# Altium PCB PCB2.PcbDoc
Units mm, origin at the board's own origin, x right, y up, seen from the top; angles counter-clockwise.
Board outline 152.4 x 101.6 mm, 2 copper layers (Top Layer, Bottom Layer); 39 components, 32 nets, 125 pads, 0 vias.
Unrouted connection lines stored in the file: 9.
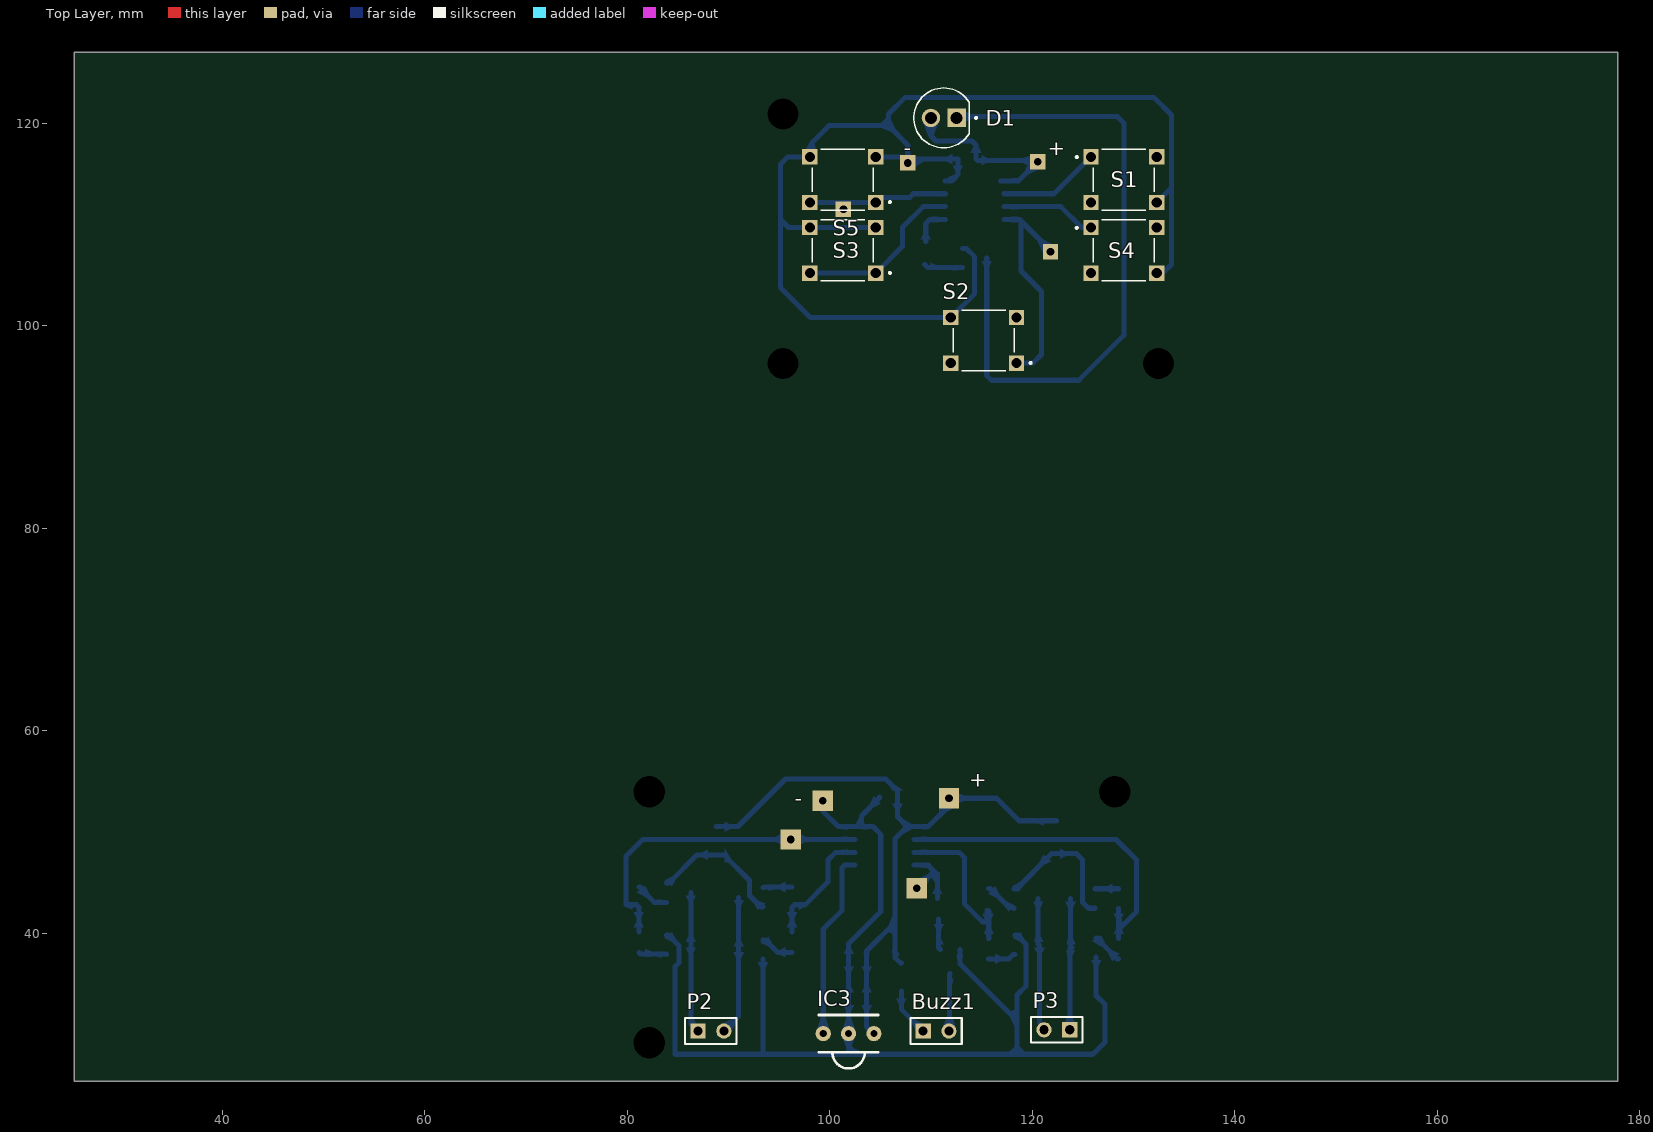
[diagram p0: Top Layer view]
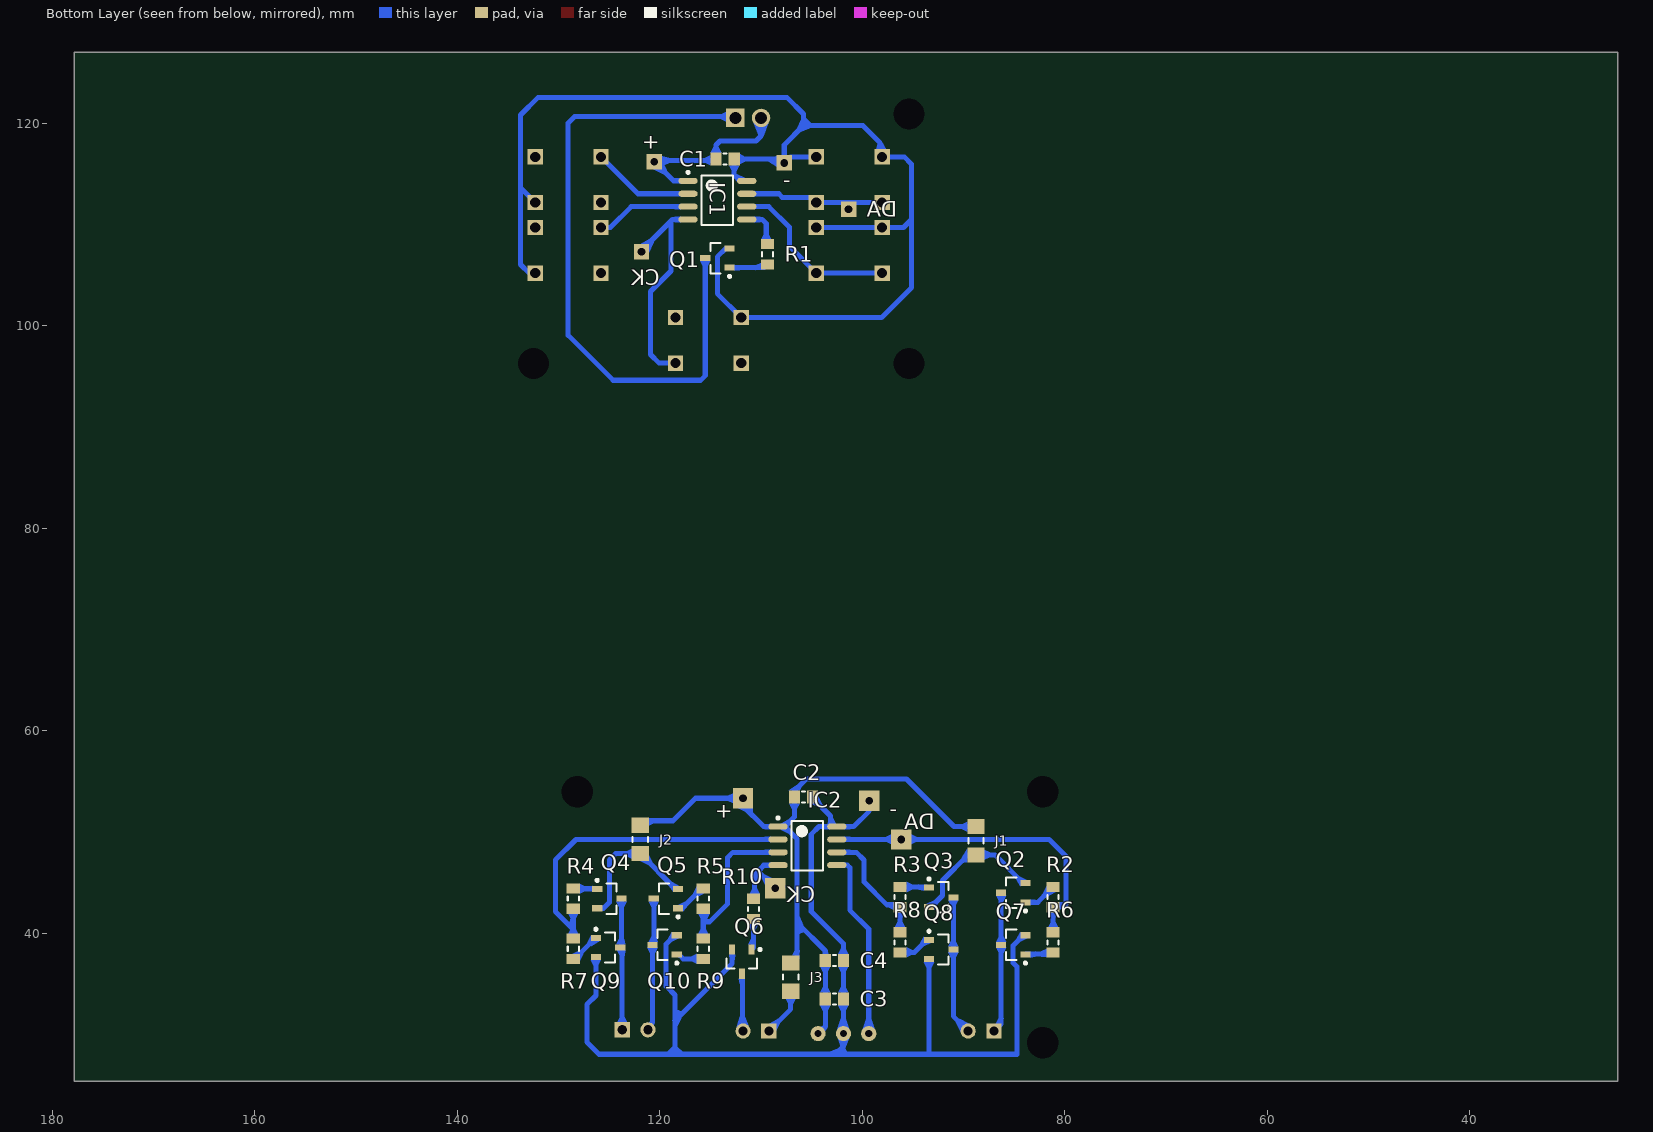
[diagram p1: Bottom Layer view, seen from below]
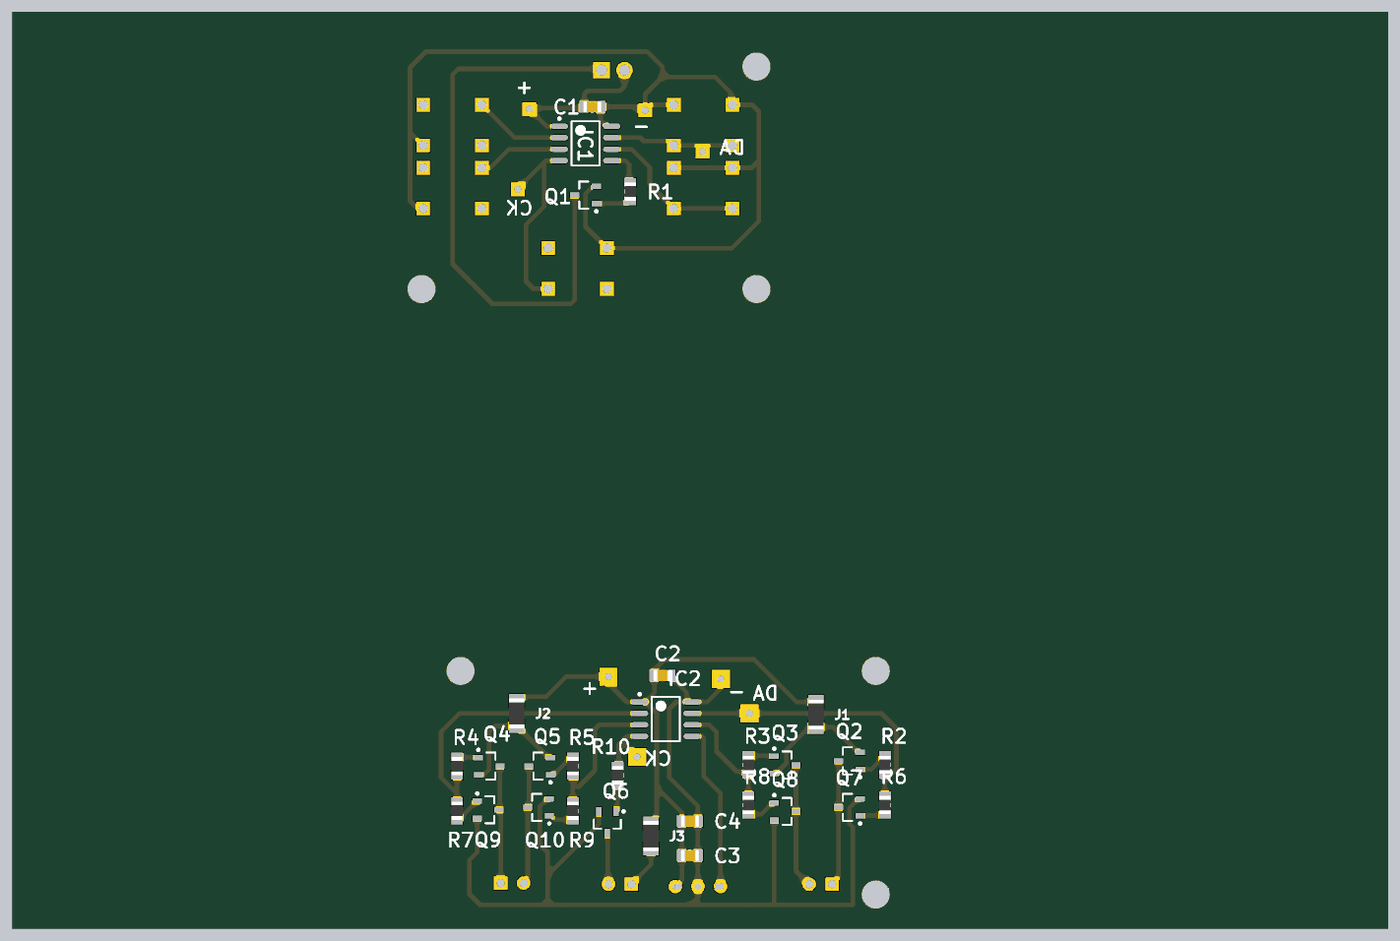
[diagram p2: 3D render of the assembled board from below, using the file's embedded part models]

## Layer stack, top to bottom
Top Solder: solder mask 0.0102, Solder Resist, Dk 3.5
Top Layer: signal copper 0.0356
Dielectric 1: dielectric 0.32, FR-4, Dk 4.8
Bottom Layer: signal copper 0.0356
Bottom Solder: solder mask 0.0102, Solder Resist, Dk 3.5

## Board outline
25.4,25.4 177.8,25.4 177.8,127 25.4,127

## Design rules (kind name [scope] priority, off if disabled: settings)
Clearance [All] p1: gap=0.3 ignorepadtopadclearanceinfootprint=FALSE
PolygonConnect [All] p1: connectstyle=Relief reliefconductorwidth=0.254 reliefentries=4 polygonreliefangle="90 Angle" airgapwidth=0.254
RoutingVias [All] p1: holewidth=0.711 width=1.27 viastyle="Through Hole" minholewidth=0.711 minwidth=1.27 maxholewidth=0.711 maxwidth=1.27
SolderMaskExpansion [All] p1: expansion=0.102
Width [All] p1: maxlimit=1 minlimit=0.254 preferedwidth=0.5
30 further rules are at their usual default settings.

## Classes and differential pairs
component class Sheet1: Buzz1 C1 C2 C3 C4 D1 IC1 IC2 IC3 P2 P3 Q1 Q2 Q3 Q4 Q5 Q6 Q7 Q8 Q9 Q10 R1 R2 R3 R4 R5 R6 R7 R8 R9 R10 S1 S2 S3 S4 S5

## Components (designator, comment, footprint, x,y, rotation, side; value= is the part's Value field where it differs from the comment)
Buzz1 "Header 2" HDR1X2 109.22,30.353 r0 top
C1 "Capacitor" CAPC2012X08N-805 113.538,116.459 r180 bottom value=100n
C2 "Capacitor" CAPC2012X08N-805 105.791,53.467 r180 bottom value=100n
C3 "Capacitor" CAPC2012X08N-805 102.743,33.528 r180 bottom value=100u
C4 "Capacitor" CAPC2012X08N-805 102.743,37.338 r180 bottom value=100n
D1 "L08R5000Q1" LEDRD254W57D500H1070 111.252,120.523 r180 top
IC1 "HT66f002" ht66f002 114.3,112.395 r180 bottom
IC2 "HT66f002" ht66f002 105.41,48.641 r180 bottom
IC3 "VS838" VS838 101.854,30.099 r90 top
J1 "Resistor" RESC3216X08N-1206 88.773,49.149 r90 bottom value=1k (schematic designator R111)
J2 "Resistor" RESC3216X08N-1206 121.92,49.276 r90 bottom value=1k (schematic designator R111)
J3 "Resistor" RESC3216X08N-1206 107.061,35.687 r90 bottom value=1k (schematic designator R111)
P2 "Header 2" HDR1X2 86.995,30.353 r0 top
P3 "Header 2" HDR1X2 123.698,30.48 r180 top
Q1 "c945" c945 114.3,106.68 r0 bottom
Q2 "PNP" pmbt8550 85.09,44.011 r0 bottom
Q3 "PNP" pmbt8550 92.202,43.561 r180 bottom
Q4 "PNP" pmbt8550 124.968,43.434 r180 bottom
Q5 "PNP" pmbt8550 119.38,43.434 r0 bottom
Q6 "NPN" MMBT8050 111.887,37.211 r270 bottom
Q7 "NPN" MMBT8050 85.09,38.862 r0 bottom
Q8 "NPN" MMBT8050 92.202,38.412 r180 bottom
Q9 "NPN" MMBT8050 125.095,38.608 r180 bottom
Q10 "NPN" MMBT8050 119.507,38.862 r0 bottom
R1 "Resistor" RESC2012X06N-805 109.347,107.061 r270 bottom value=1K
R2 "Resistor" RESC2012X06N-805 81.153,43.577 r90 bottom value=1k
R3 "Resistor" RESC2012X06N-805 96.266,43.577 r90 bottom value=1k
R4 "Resistor" RESC2012X06N-805 128.524,43.434 r90 bottom value=1k
R5 "Resistor" RESC2012X06N-805 115.697,43.434 r90 bottom value=1k
R6 "Resistor" RESC2012X06N-805 81.153,39.116 r90 bottom value=1k
R7 "Resistor" RESC2012X06N-805 128.524,38.481 r90 bottom value=1k
R8 "Resistor" RESC2012X06N-805 96.266,39.116 r90 bottom value=1k
R9 "Resistor" RESC2012X06N-805 115.697,38.481 r90 bottom value=1k
R10 "Resistor" RESC2012X06N-805 110.744,42.418 r270 bottom value=1k
S1 "TS04-66-95-BK-100-SMT" SW_TS02-66-43-BK-160-SCR-D 129.032,114.427 r0 top
S2 "TS04-66-95-BK-100-SMT" SW_TS02-66-43-BK-160-SCR-D 115.189,98.552 r180 top
S3 "TS04-66-95-BK-100-SMT" SW_TS02-66-43-BK-160-SCR-D 101.284,107.442 r180 top
S4 "TS04-66-95-BK-100-SMT" SW_TS02-66-43-BK-160-SCR-D 129.032,107.442 r0 top
S5 "TS04-66-95-BK-100-SMT" SW_TS02-66-43-BK-160-SCR-D 101.284,114.427 r180 top

## Footprints (in the part's own frame and the unit in brackets; to place one, negate y for a bottom-side part, rotate by r counter-clockwise, add the part's x,y. Pads: shape width x height; smd on the part's side, far side on the other; paste and mask are expansions set on the pad)
c945 [mm] "SOT23, 3-Leads, Body 2.90x2.45mm, Pitch 0.95mm, IPC Medium Density"
  rect 1x0.6 smd: B(-1.2,0.95) C(1.2,0) E(-1.2,-0.95)
  silkscreen extent -1.32,-1.5 0.7,1.92, body extent -0.7,-1.5 0.7,1.5, height 1.1
CAPC2012X08N-805 [mm] "Chip Capacitor, 2-Leads, Body 2.00x1.25mm, IPC Medium Density"
  rect 1.1x1.3 smd: 1(-0.9,0) 2(0.9,0)
  silkscreen extent -0.15,-0.55 0.15,0.55, body extent -1,-0.63 1,0.63, height 0.8
HDR1X2 [mm] "Connector; Header; 2 Position"
  rect 1.5x1.5 hole 0.9: 1(0,0)
  round 1.5 hole 0.9: 2(2.54,0)
  silkscreen extent -1.27,-1.27 3.81,1.27
ht66f002 [mm] "SOIC, 8-Leads, Body 4.90x3.90mm, Pitch 1.27mm, IPC Medium Density"
  oval 1.9x0.6 smd: 1(-2.9,1.905) 2(-2.9,0.635) 3(-2.9,-0.635) 4(-2.9,-1.905) 5(2.9,-1.905) 6(2.9,-0.635) 7(2.9,0.635) 8(2.9,1.905)
  silkscreen extent -3.03,-2.45 1.55,2.88, body extent -1.95,-2.45 1.95,2.45, height 1.75
LEDRD254W57D500H1070 [mm]
  round 1.815 hole 1.21: A(1.27,0)
  rect 1.815x1.815 hole 1.21: C(-1.27,0)
  silkscreen extent -3.3,-2.96 2.96,2.96
MMBT8050 [mm] "SOT23, 3-Leads, Body 2.90x2.45mm, Pitch 0.95mm, IPC Medium Density"
  rect 1x0.6 smd: 1(-1.2,0.95) 2(-1.2,-0.95) 3(1.2,0)
  silkscreen extent -1.32,-1.5 0.7,1.92, body extent -0.7,-1.5 0.7,1.5, height 1.1
pmbt8550 [mm] "SOT23, 3-Leads, Body 2.90x2.45mm, Pitch 0.95mm, IPC Medium Density"
  rect 1x0.6 smd: 1(-1.2,0.95) 2(-1.2,-0.95) 3(1.2,0)
  silkscreen extent -1.32,-1.5 0.7,1.92, body extent -0.7,-1.5 0.7,1.5, height 1.1
RESC2012X06N-805 [mm] "Chip Resistor, 2-Leads, Body 2.00x1.25mm, IPC Medium Density"
  rect 1x1.3 smd: 1(-1,0) 2(1,0)
  silkscreen extent -0.2,-0.55 0.2,0.55, body extent -1,-0.63 1,0.63, height 0.6
RESC3216X08N-1206 [mm] "Chip Resistor, 2-Leads, Body 3.20x1.60mm, IPC Medium Density"
  rect 1.5x1.7 smd: 1(-1.4,0) 2(1.4,0)
  silkscreen extent -0.25,-0.75 0.25,0.75, body extent -1.65,-0.85 1.65,0.85, height 0.8
SW_TS02-66-43-BK-160-SCR-D [mm]
  rect 1.508x1.508 / inner round 1.508 / far side rect 1.508x1.508 hole 1: 1(-3.25,2.25)
  rect 1.508x1.508 hole 1: 2(-3.25,-2.25) 3(3.25,2.25) 4(3.25,-2.25)
  silkscreen extent -4.75,-3 3,3
VS838 [mm]
  round 1.5 hole 0.7: 1(0,2.5) 2(0,0) 3(0,-2.5)
  silkscreen extent -3.44,-2.95 1.84,2.95, body extent -3.42,-2.54 1.38,2.54, height 11

## Part data
Buzz1 P2 P3: "Header, 2-Pin", LatestRevisionDate=17-Jul-2002, LatestRevisionNote="Re-released for DXP Platform.", Publisher="Altium Limited"
C1 C2 C3 C4: "Standard Bipolar Capasitor"
D1: "LED, Orange, Through Hole, T-1 3/4 (5mm), 30 mA, 2.1 V, 635 nm", Package=None, Availability=Unavailable, MP=L08R5000Q1, Price=None
J1 J2 J3 R1 R2 R3 R4 R5 R6 R7 R8 R9 R10: "Standard Resistor"
Q2 Q3 Q4 Q5: library part pmbt8550
Q6 Q7 Q8 Q9 Q10: library part MMBT8050
S1 S2 S3 S4 S5: "6 x 6 mm, 4.3~9.5 mm Actuator Height, 100~260 gf, Surface Mount, SPST, Tactile Switch", Package=None, Availability="In Stock", Check_prices=https://www.snapeda.com/parts/TS04-66-95-BK-100-SMT/CUI+Devices/view-part/?ref=eda, CUI_purchase_URL=https://www.cuidevices.com/product/switches/tactile-switches/ts04-series?utm_source=snapeda.com&utm_medium=referral&utm_campaign=snapedaBOM, MF="CUI Devices", MP=TS04-66-95-BK-100-SMT, Price=None, Purchase-URL=https://pricing.snapeda.com/search/part/TS04-66-95-BK-100-SMT/?ref=eda, SnapEDA_Link=https://www.snapeda.com/parts/TS04-66-95-BK-100-SMT/CUI+Devices/view-part/?ref=snap

## Free pads (board coordinates)
  round 1.524 hole 3.1: 2(132.461,96.266) 3(95.377,96.266) 4(95.377,120.904) 13(128.143,53.975) 14(82.169,53.975) 15(82.169,29.21)
  rect 1.524x1.524 hole 0.762: 5(121.793,107.315) 6(120.523,116.205) 7(101.346,111.506) 8(107.696,116.078)
  rect 2x2 hole 0.762: 9(111.76,53.34) 10(99.314,53.086) 11(108.585,44.45) 12(96.139,49.276)

## Nets (pads, with @x,y where several pads share a name; then routed paths per layer and width w, separated by ;. In a path a pad name is that pad's centre, name@x,y a point inside that pad or via, vN(x,y) a via of type N, cw(c..) or ccw(c..) an arc to the next point about the centre after c; other vN are vias at no path point)
C1: IC2.7 pad.12 R2.1 R6.2 | length 31.9
  Bottom Layer w0.5: R6.2 R2.1 80.903,42.827 79.926,42.827 79.883,42.87 79.883,47.625 81.534,49.276 87.668,49.276 87.695,49.249 89.851,49.249 89.878,49.276 IC2.7
C2: IC2.6 R3.1 R8.2 | length 12.2
  Bottom Layer w0.5: R8.2 R3.1 96.516,42.827 97.564,42.827 99.822,45.085 99.822,47.244 100.584,48.006 IC2.6
C3: IC2.4 pad.11 R10.1 | length 7.7
  Bottom Layer w0.5: IC2.4 109.728,46.736 110.617,45.847 ; pad.11 109.982,45.847 110.617,45.847 ; R10.1@110.617,43.434 110.617,45.847
C4: IC2.2 R4.1 R7.2 | length 34.9
  Bottom Layer w0.5: IC2.2 128.27,49.276 130.302,47.244 130.302,42.164 128.778,40.64 128.524,40.894 R4.1 R7.2
C5: IC2.3 R5.1 R9.2 | length 16.8
  Bottom Layer w0.5: IC2.3 112.776,48.006 113.284,47.498 113.284,42.926 115.062,41.148 115.531,41.148 115.531,42.268 115.613,42.268 115.697,42.184 R9.2
ICPCK: IC1.4 pad.5 S2.1 S2.3 | length 22.8
  Bottom Layer w0.5: IC1.4 118.723,110.49 118.872,110.341 ; S2.1 120.051,96.302 120.904,97.155 120.904,103.378 118.872,105.41 118.872,110.341 ; pad.5 121.793,107.42 118.872,110.341
ICPDA: IC1.7 pad.7 S5.1 S5.3 | length 13.7
  Bottom Layer w0.5: S5.3 S5.1 105.038,112.681 107.894,112.681 108.243,113.03 IC1.7
key_1: IC1.2 S1.1 S1.3 | length 10.2
  Bottom Layer w0.5: IC1.2 122.135,113.03 S1.1 ; S1.1@125.824,116.793 S1.1@125.825,116.677
key_3: IC1.6 S3.1 S3.3 | length 17.2
  Bottom Layer w0.5: S3.3 S3.1 107.188,107.846 107.188,109.728 109.22,111.76 IC1.6
key_4: IC1.3 S4.1 S4.3 | length 9.6
  Bottom Layer w0.5: IC1.3 122.809,111.76 124.877,109.692 S4.1 S4.1@125.984,109.692
NetBuzz1_2: Buzz1.2 Q6.3 | length 5.7
  Bottom Layer w0.5: Buzz1.2 111.837,30.43 111.837,35.961 Q6.3
NetD1_C: D1.C Q1.C | length 65
  Bottom Layer w0.5: D1.C 112.649,120.65 128.397,120.65 129.032,120.015 129.032,99.06 124.587,94.615 115.951,94.615 115.5,95.066 Q1.C
NetIC1_5: IC1.5 R1.1 | length 3.8
  Bottom Layer w0.5: R1.1@109.474,108.331 109.474,110.087 109.877,110.49 IC1.5
NetP2_1: P2.1 Q2.3 Q7.3 | length 14
  Bottom Layer w0.5: Q2.3 Q7.3 86.29,31.058 P2.1
NetP2_2: P2.2 Q3.3 Q8.3 | length 13.8
  Bottom Layer w0.5: P2.2 91.002,31.82 Q8.3 Q3.3
NetP3_1: P3.1 Q4.3 Q9.3 | length 13.1
  Bottom Layer w0.5: P3.1 123.698,38.558 123.748,38.608 Q9.3@123.818,38.608 ; Q4.3 123.768,38.658 Q9.3@123.818,38.608 ; Q9.3 Q9.3@123.818,38.608
NetP3_2: P3.2 Q5.3 Q10.3 | length 13.2
  Bottom Layer w0.5: Q5.3 120.58,38.912 120.63,38.862 Q10.3 120.707,31.202 121.158,30.751 P3.2
NetQ1_B: Q1.B R1.2 | length 3.9
  Bottom Layer w0.5: R1.2 109.678,105.73 Q1.B
NetQ2_1: Q2.1 R2.2 | length 3.5
  Bottom Layer w0.5: R2.2 81.303,44.577 81.553,44.327 81.553,44.177 82.669,43.061 Q2.1
NetQ3_1: Q3.1 R3.2 | length 2.9
  Bottom Layer w0.5: Q3.1 93.602,44.511 93.668,44.577 R3.2
NetQ4_1: Q4.1 R4.2 | length 2.4
  Bottom Layer w0.5: Q4.1 126.193,44.409 128.499,44.409 R4.2
NetQ5_1: Q5.1 R5.2 | length 3.3
  Bottom Layer w0.5: R5.2 115.847,44.434 117.747,42.534 118.13,42.534 Q5.1
NetQ6_1: Q6.1 R10.2 | length 3.1
  Bottom Layer w0.5: R10.2@110.744,41.402 110.744,38.604 Q6.1
NetQ7_1: Q7.1 R6.1 | length 2.8
  Bottom Layer w0.5: R6.1 81.307,37.962 83.84,37.962 Q7.1
NetQ8_1: Q8.1 R8.1 | length 3.4
  Bottom Layer w0.5: Q8.1 93.602,39.362 94.848,38.116 R8.1
NetQ9_1: Q9.1 R7.1 | length 3.2
  Bottom Layer w0.5: Q9.1 126.495,39.558 126.545,39.508 126.545,39.31 128.374,37.481 R7.1
NetQ10_1: Q10.1 R9.1 | length 2.8
  Bottom Layer w0.5: R9.1 117.676,37.481 118.107,37.912 Q10.1
SIG: IC2.5 IC3.1 | length 18.6
  Bottom Layer w0.5: IC3.1 99.354,40.426 101.219,42.291 101.219,46.482 101.473,46.736 IC2.5
V+: C1.1 D1.A IC1.1 pad.6 | length 19
  Bottom Layer w0.5: D1.A@109.626,120.523 D1.A 109.982,118.745 110.49,118.237 114.046,118.237 114.438,117.845 C1.1 114.565,116.332 120.396,116.332 pad.6 118.618,114.3 IC1.1 IC1.1@116.837,114.3
V++: Buzz1.1 C2.1 C3.1 C4.1 IC2.1 IC3.3 J1.1 J1.2 J2.1 J2.2 J3.1 J3.2 pad.9 Q2.2 Q3.2 Q4.2 Q5.2 | length 101.2
  Bottom Layer w0.5: Q2.2 84.09,44.961 86.881,47.752 89.535,47.752 92.075,45.212 92.075,43.738 93.202,42.611 Q3.2 ; J1.2@88.773,50.546 90.932,50.546 95.631,55.245 105.537,55.245 106.691,54.091 C2.1 106.691,51.515 IC2.1@107.66,50.546 ; C4.1 C4.1@103.632,37.349 ; IC3.3 103.632,30.821 C4.1@103.632,37.349 ; J3.1 107.061,32.512 Buzz1.1 Buzz1.1@108.966,30.099 ; J3.2 106.961,37.087 106.461,37.587 106.461,37.687 106.426,37.722 106.426,41.061 ; Q5.2 118.425,44.384 121.92,47.879 124.333,47.879 124.968,47.244 124.968,43.053 125.537,42.484 Q4.2 ; J2.2@122.364,51.12 118.679,51.12 116.459,53.34 pad.9 111.76,52.578 109.728,50.546 IC2.1 IC2.1@107.66,50.546 ; C4.1@103.632,37.349 103.632,38.267 106.426,41.061 ; 106.426,41.061 106.426,49.312 IC2.1@107.66,50.546
V-: C1.2 IC1.8 pad.8 Q1.E S1.2 S1.4 S2.2 S2.4 S3.2 S3.4 S4.2 S4.4 S5.2 S5.4 | length 126.6
  Bottom Layer w0.5: S3.2 S3.4 95.921,109.692 95.123,110.49 ; S5.2 107.097,116.677 pad.8 ; IC1.8 112.023,114.3 112.638,114.915 C1.2 108.354,116.459 107.973,116.078 pad.8 ; Q1.E 113.477,107.63 114.3,106.807 114.3,103.163 S2.4 98.08,100.802 95.123,103.759 95.123,110.49 ; S4.4 132.878,105.192 133.731,106.045 133.731,113.626 ; S1.4 133.731,113.626 ; 95.123,110.49 95.123,115.951 95.849,116.677 S5.4 98.227,116.87 98.227,118.039 99.949,119.761 105.791,119.761 ; 105.791,119.761 105.791,120.904 107.442,122.555 131.992,122.555 133.731,120.816 133.731,113.626 ; 105.791,119.761 107.696,117.856 pad.8
V--: C2.2 C3.2 C4.2 IC2.8 IC3.2 pad.10 Q6.2 Q7.2 Q8.2 Q9.2 Q10.2 | length 130.5
  Bottom Layer w0.5: Q7.2 84.09,39.812 85.09,38.812 85.09,37.084 84.709,36.703 84.709,28.067 93.472,28.067 ; Q8.2 93.402,28.137 93.472,28.067 ; pad.10 99.314,52.07 100.838,50.546 IC2.8 IC2.8@103.074,50.546 ; C4.2 C4.2@101.843,37.438 ; C2.2 104.891,53.367 103.12,51.596 103.12,50.592 IC2.8@103.074,50.546 ; Q6.2 112.837,37.023 118.491,31.369 ; Q10.2 118.507,39.812 119.357,38.962 119.357,34.775 118.491,33.909 118.491,31.369 ; Q9.2 126.295,33.872 127.174,32.993 127.174,29.257 125.984,28.067 118.491,28.067 ; 93.472,28.067 102.616,28.067 ; 102.616,28.067 118.491,28.067 ; 102.616,28.067 101.854,28.829 IC3.2 101.854,38.989 105.029,42.164 105.029,49.784 104.267,50.546 IC2.8@103.074,50.546 ; 118.491,28.067 118.491,31.369

## Silkscreen, mask and mechanical layers (free items; w line width, h text height)
Top Overlay:
  text "-" at 107.315,116.84 h1.52
  text "+" at 121.539,116.84 h1.52
  text "+" at 113.792,54.483 h1.52
  text "-" at 96.52,52.578 h1.52
Bottom Overlay:
  text "+" at 120.015,117.475 h1.52
  text "-" at 107.061,113.665 h1.52
  text "DA" at 96.52,110.744 h1.52
  text "CK" at 120.015,104.013 h1.52
  text "-" at 96.52,51.562 h1.52
  text "+" at 112.776,51.435 h1.52
  text "DA" at 92.837,50.292 h1.52
  text "CK" at 104.648,43.053 h1.52
Mechanical 1:
  lines w0.254: 134.239,93.599 92.837,93.599 92.837,123.571 134.265,123.571 134.265,93.599 ; 78.613,26.289 78.613,57.15 131.191,57.15 131.191,26.289 78.613,26.289